# Altium PCB FPv0.12.PcbDoc (part 1 of 2)
Units mm, origin at the board's own origin, x right, y up, seen from the top; angles counter-clockwise.
Board outline 81.28 x 53.34 mm, 4 copper layers (Top Layer, GROUND PLANE, MidLayer1, Bottom Layer); 94 components, 141 nets, 574 pads, 258 vias.
Unrouted connection lines stored in the file: 31.
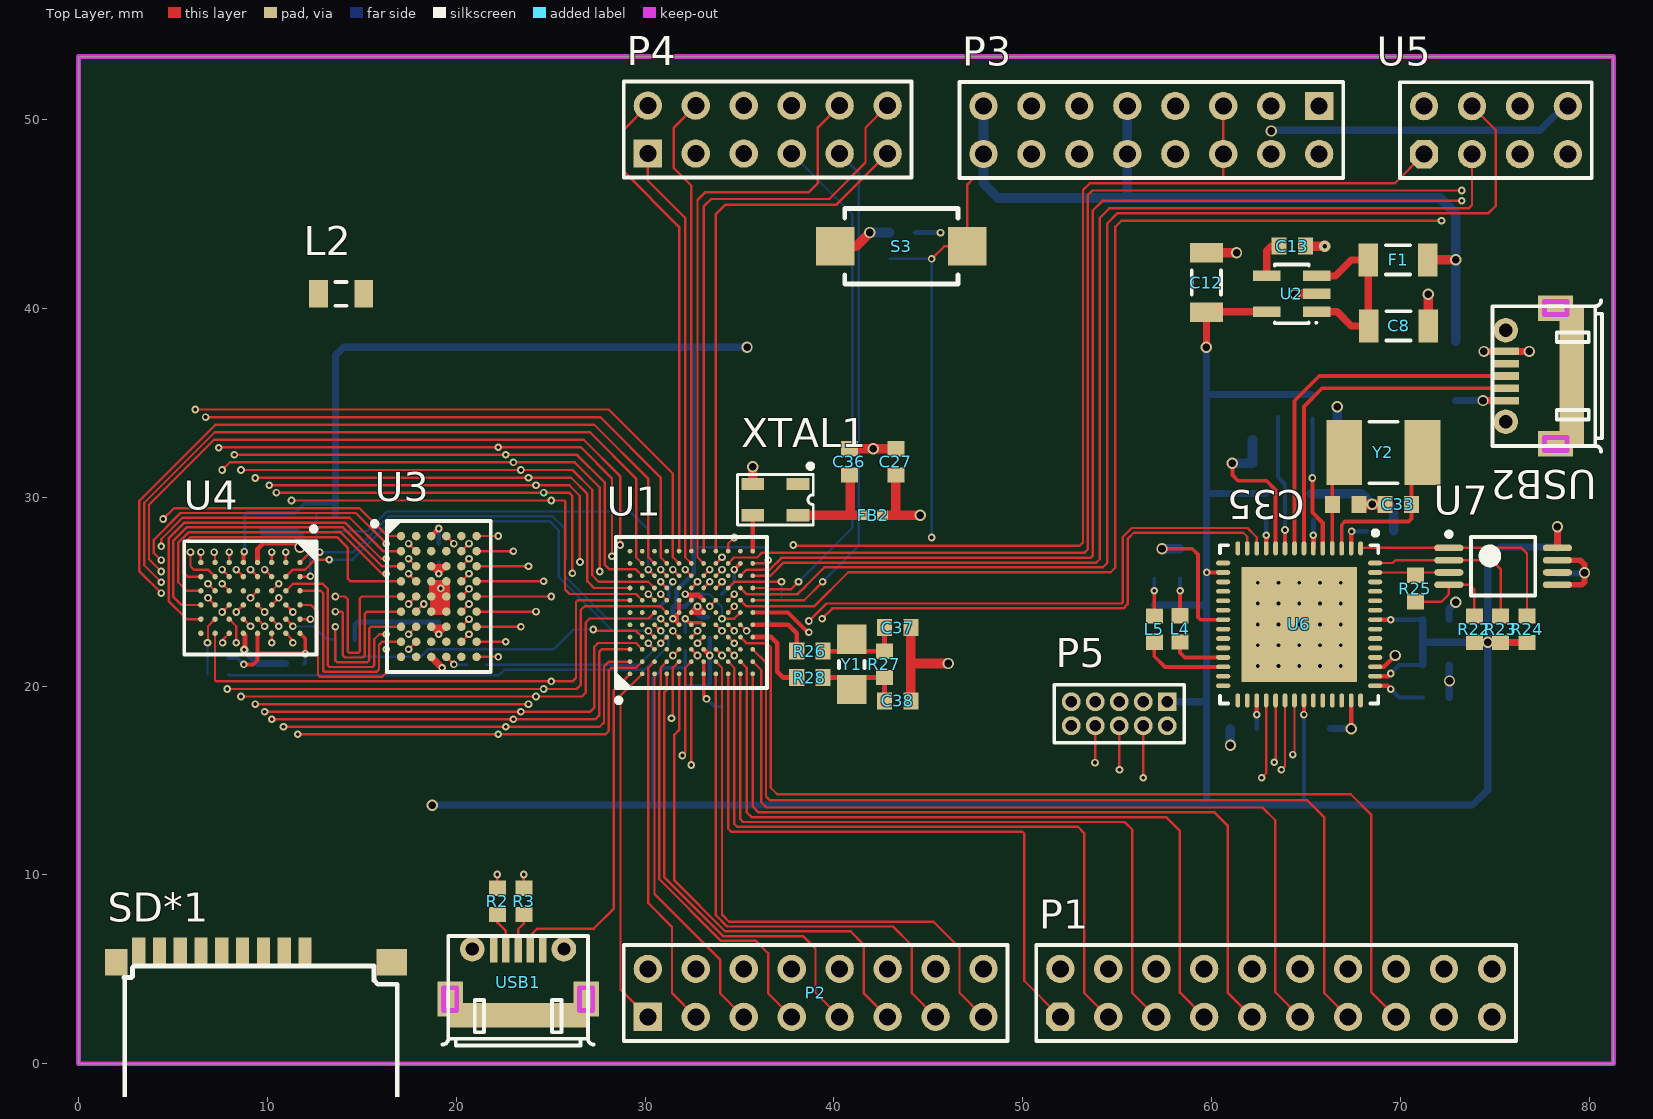
[diagram p0: Top Layer view]
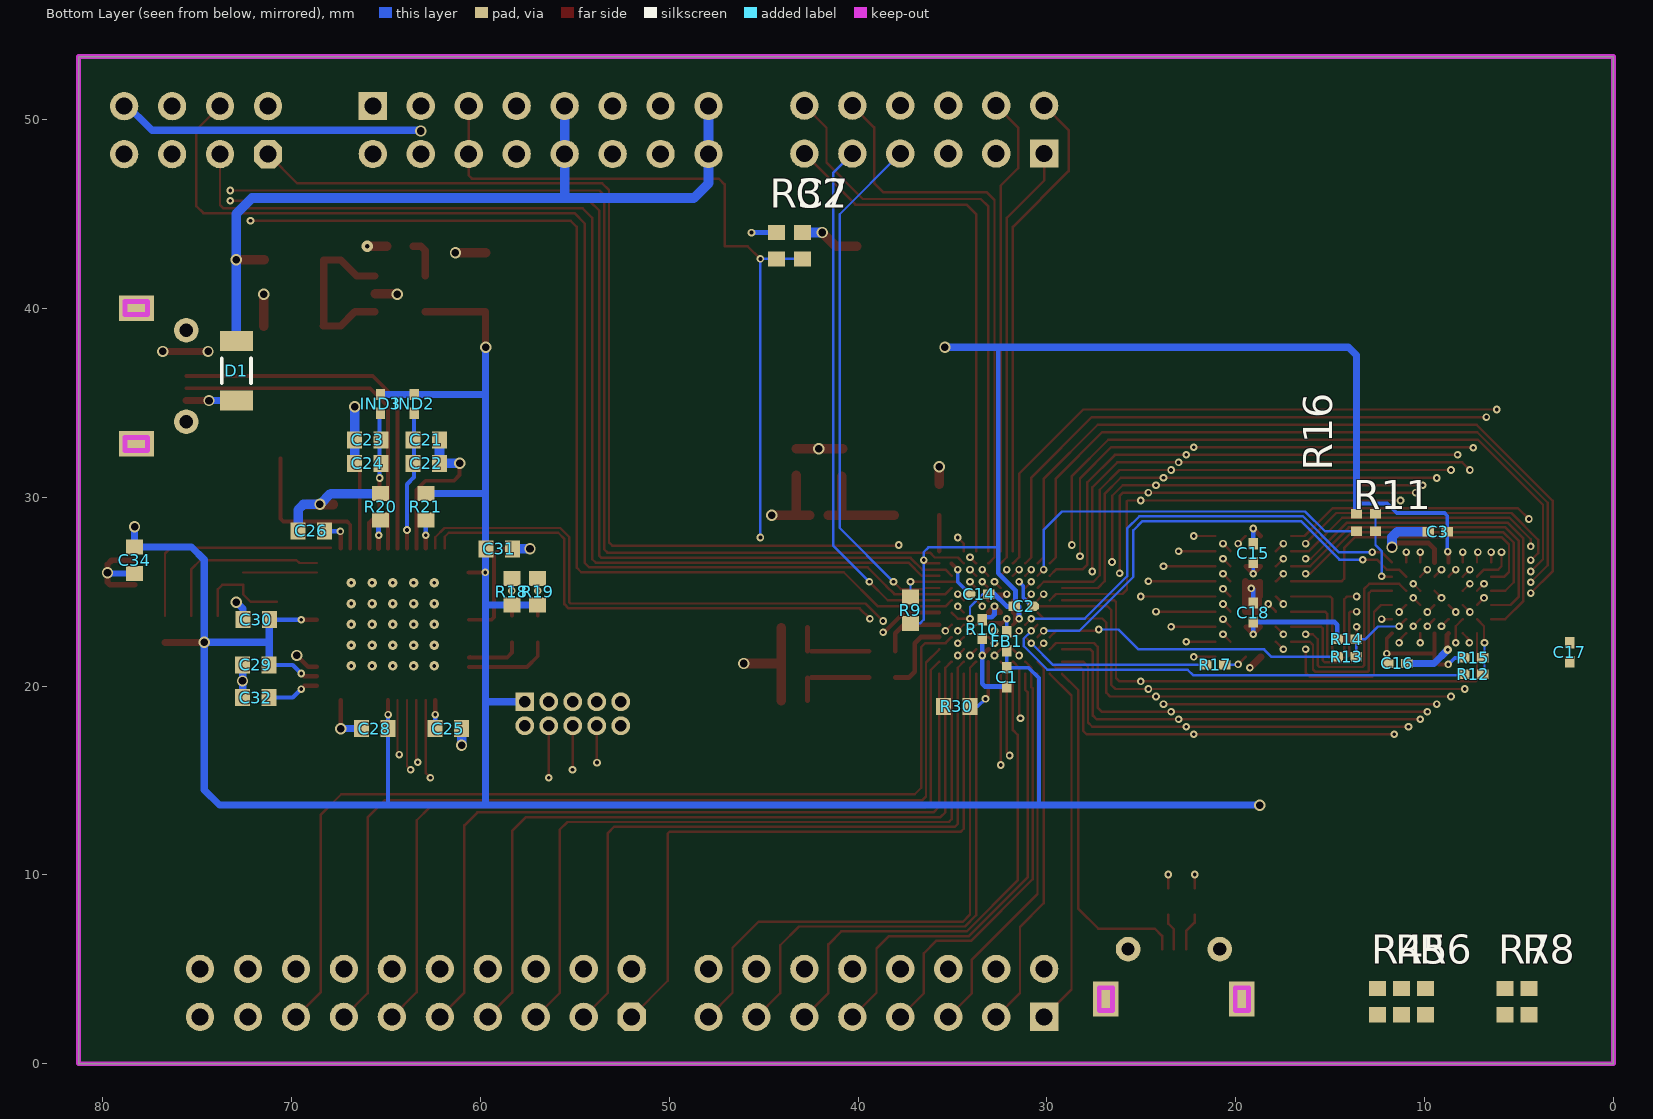
[diagram p1: Bottom Layer view, seen from below]
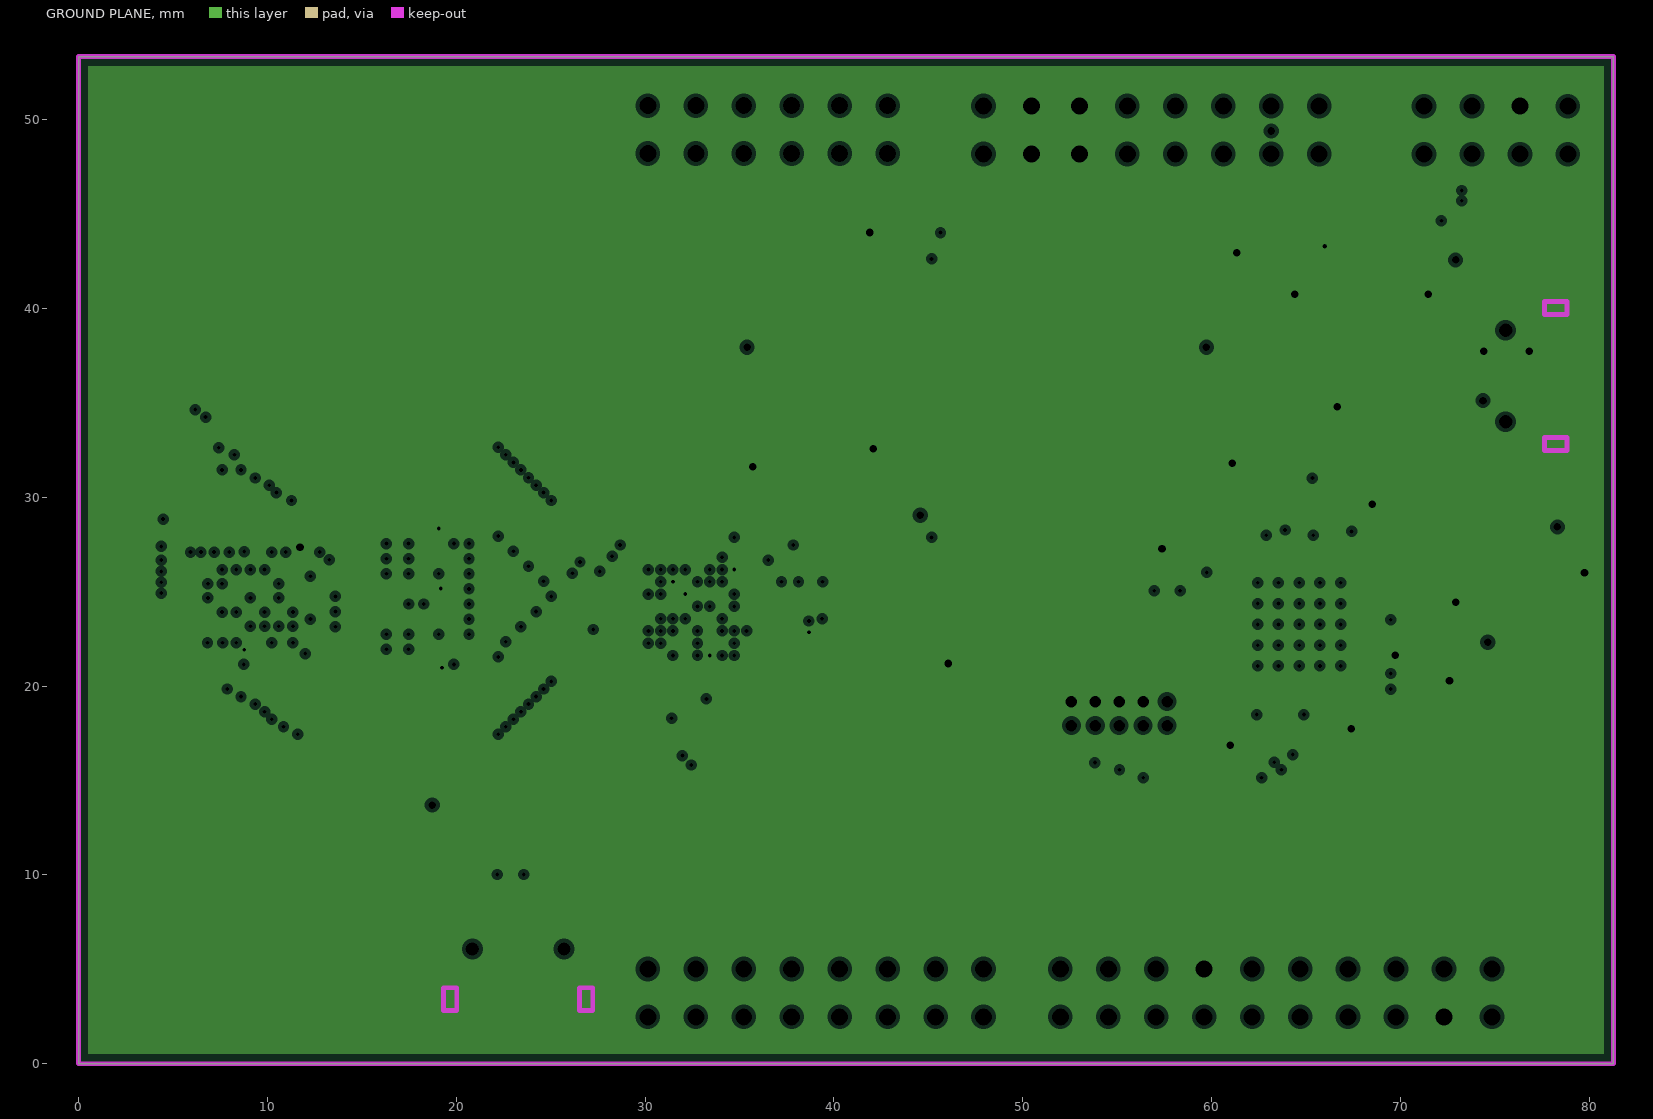
[diagram p2: GROUND PLANE, clearances drawn from the general rule]
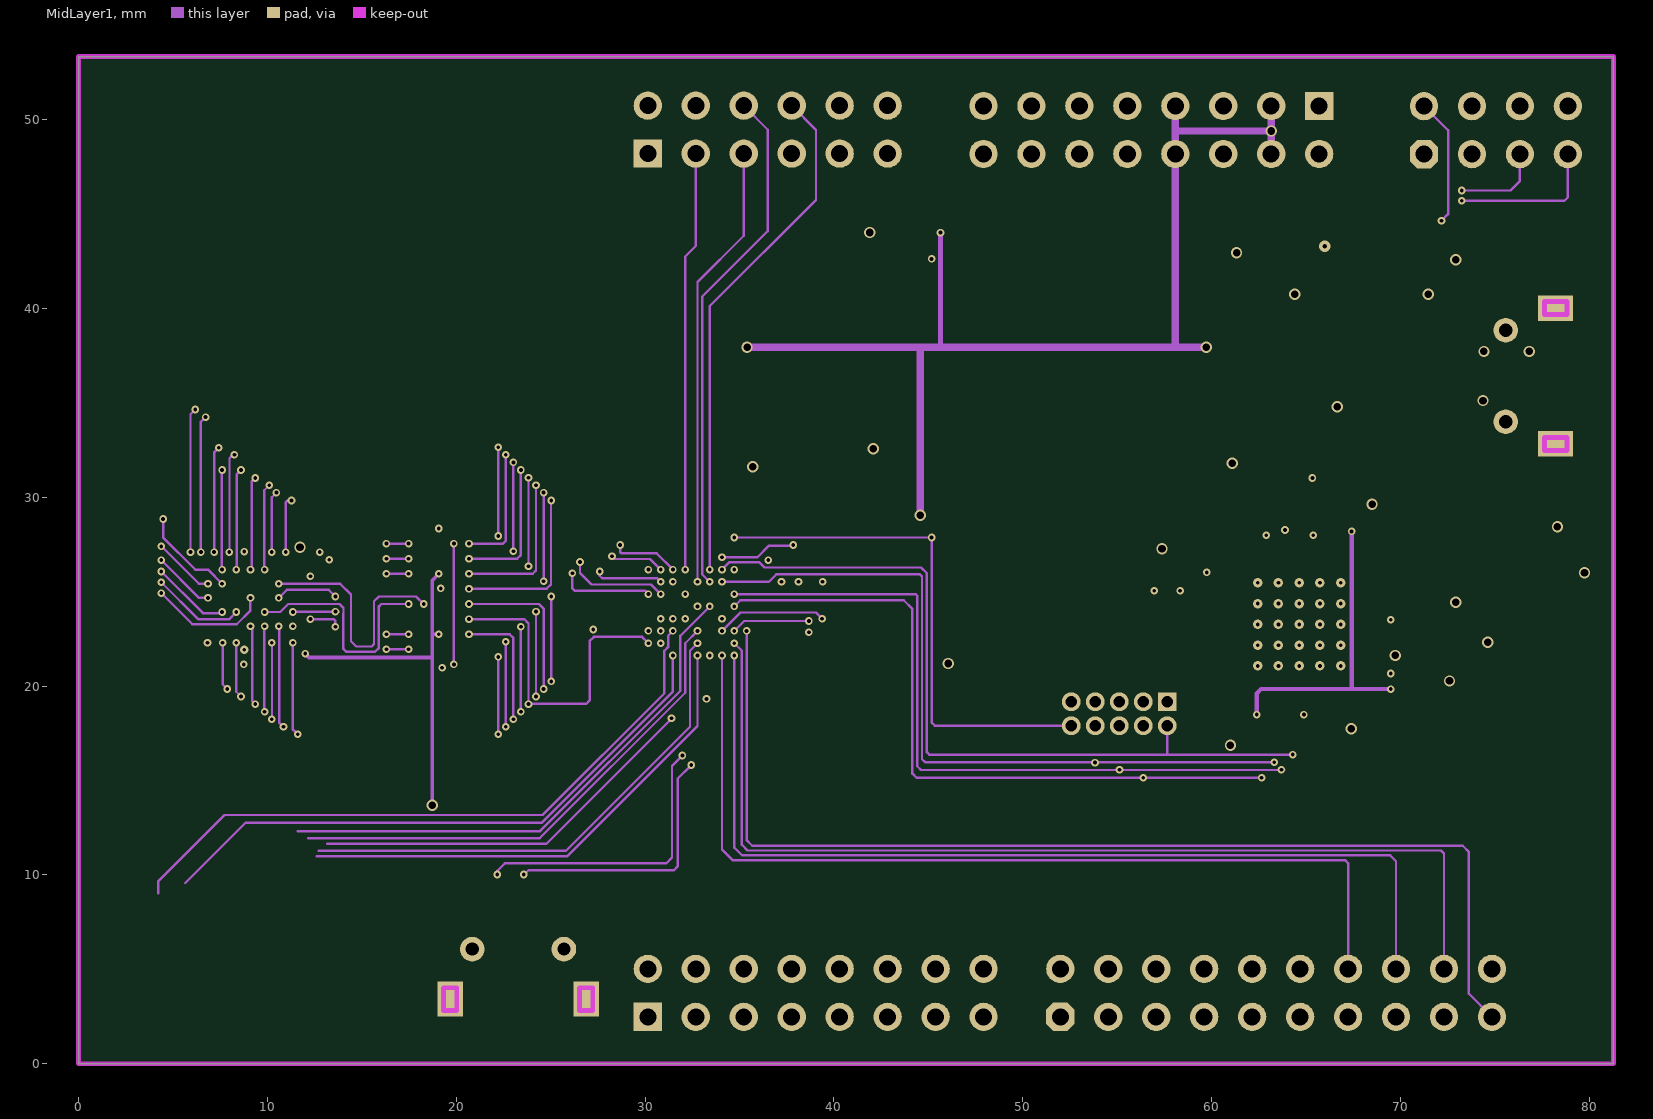
[diagram p3: MidLayer1]

## Layer stack, top to bottom
Top Layer: signal copper 0.0356
Dielectric: prepreg 0.32, FR-4, Dk 4.8
GROUND PLANE: plane copper 0.0356, net GND
Dielectric: core 0.32, FR-4, Dk 4.8
MidLayer1: signal copper 0.0356
Dielectric: prepreg 0.32, FR-4, Dk 4.8
Bottom Layer: signal copper 0.0356

## Board outline
0,0 0,53.34 81.28,53.34 81.28,0

## Design rules (kind name [scope] priority, off if disabled: settings)
Clearance [All] p1: gap=0.127
DiffPairsRouting [All] p1: maxlimit=0.254 minlimit=0.254 mostfreqgap=0.254 maxuncoupledlength=12.7
HoleSize [All] p1: absolutevalues=TRUE maxlimit=2.54 minlimit=0.2 maxpercent=80.000 minpercent=20.000
PlaneClearance [All] p1: clearance=0.203
PlaneConnect [All] p1: planeconnectstyle=Relief reliefexpansion=0.508 reliefentries=4 reliefconductorwidth=0.254 reliefairgap=0.254
PolygonConnect [All] p1: connectstyle=Relief reliefconductorwidth=0.254 reliefentries=4 polygonreliefangle="90 Angle" airgapwidth=0.254
RoutingVias [All] p1: holewidth=0.711 width=1.27 viastyle="Through Hole" minholewidth=0.711 minwidth=1.27 maxholewidth=0.711 maxwidth=1.27
SolderMaskExpansion [All] p1: expansion=0.102
Width [All] p1: maxlimit=1.778 minlimit=0.127 preferedwidth=0.254 minimp=50.000000 maximp=50.000000 favimp=50.000000
24 further rules are at their usual default settings.

## Classes and differential pairs
from-to class SRAM_DATA: "AD0 (U1-B2 : U4-B6)" "AD1 (U1-A2 : U4-C5)" "AD2 (U1-A3 : U4-C6)" "AD3 (U1-B3 : U4-D5)" "AD4 (U1-C3 : U4-E5)" "AD5 (U1-C6 : U4-F5)" "AD6 (U1-D6 : U4-F6)" "AD7 (U1-A7 : U4-G6)" "AD8 (U1-B7 : U4-B1)" "AD9 (U1-C7 : U4-C1)" "AD10 (U1-D7 : U4-C2)" "AD11 (U1-A8 : U4-D2)" "AD12 (U1-C8 : U4-E2)" "AD13 (U1-D8 : U4-F2)" "AD14 (U1-B9 : U4-F1)" "AD15 (U1-D9 : U4-G1)" "AD16 (U1-E9 : U4-F4)" "AD17 (U1-B10 : U4-E4)" "AD18 (U1-C10 : U4-D3)" "AD19 (U1-D10 : U4-H1)" "AD20 (U1-E10 : U4-G2)"
component class MCU_K64FX: C1 C2 C3 C7 C27 C36 C37 C38 FB1 FB2 P5 R4 R5 R6 R7 R8 R9 R10 R26 R27 R28 R30 R32 S3 U1 XTAL1 Y1
component class Memory: C14 C15 C16 C17 C18 R11 R12 R13 R14 R15 R16 R17 U3 U4
component class power_manage: C8 C12 C13 D1 F1 L3 R31 S4 U2
component class protocol1: L1 L2 LS1 P1 P2 P3 P4 R2 R3 S1 S2 SD*1 USB1
component class protocol2: C21 C22 C23 C24 C25 C26 C28 C29 C30 C31 C32 C33 C34 C35 IND2 IND3 L4 L5 R18 R19 R20 R21 R22 R23 R24 R25 U6 U7 USB2 Y2
component class RF_mod: U5
net class AD[20..0]: AD0 AD1 AD2 AD3 AD4 AD5 AD6 AD7 AD8 AD9 AD10 AD11 AD12 AD13 AD14 AD15 AD16 AD17 AD18 AD19 AD20
net class PTE[0..6]: PTE0 PTE1 PTE2 PTE3 PTE4 PTE5 PTE6
differential pair USB0D: +USB0D_P -USB0D_N
differential pair USB1D: +USB1D_P -USB1D_N

## Components (designator, comment, footprint, x,y, rotation, side; value= is the part's Value field where it differs from the comment)
C1 "Cap" 0402#1 32.125,20.475 r90 bottom
C2 "Cap" 0402#2 31.225,24.225 r0 bottom
C3 "Cap" 0402#1 9.3,28.175 r180 bottom
C7 "Cap" 1608[0603] 42.95,43.325 r270 bottom
C8 "Cap Pol1" 1206(2) 69.9,39.075 r0 top
C12 "Cap Pol1" 1206(2) 59.725,41.375 r90 top
C13 "Cap" 1608[0603] 64.275,43.3 r180 top
C14 "Cap Pol1" 0402#3 33.575,24.875 r0 bottom
C15 "Cap" 0402#1 19.075,27.05 r270 bottom
C16 "Cap" 0402#1 11.45,21.2 r0 bottom
C17 "Cap" 0402#1 2.3,21.8 r90 bottom
C18 "Cap" 0402#1 19.075,23.9 r270 bottom
C21 "Cap Pol1" 1608[0603] 62.866,33.046 r180 bottom
C22 "Cap" 1608[0603] 62.866,31.796 r0 bottom
C23 "Cap Pol1" 1608[0603] 65.966,33.046 r0 bottom
C24 "Cap" 1608[0603] 65.966,31.796 r180 bottom
C25 "Cap" 1608[0603] 61.7,17.75 r0 bottom
C26 "Cap" 1608[0603] 68.959,28.224 r180 bottom
C27 "Cap" 1608[0603] 43.275,31.875 r270 top
C28 "Cap" 1608[0603] 65.6,17.75 r180 bottom
C29 "Cap" 1608[0603] 71.891,21.121 r180 bottom
C30 "Cap" 1608[0603] 71.88,23.525 r180 bottom
C31 "Cap" 1608[0603] 59,27.275 r0 bottom
C32 "Cap" 1608[0603] 71.891,19.396 r0 bottom
C33 "Cap" 1608[0603] 69.893,29.621 r0 top
C34 "Cap" 1608[0603] 78.316,26.671 r90 bottom
C35 "Cap" 1608[0603] 67.099,29.621 r0 top
C36 "Cap" 1608[0603] 40.825,31.875 r270 top
C37 "Cap" 1608[0603] 43.375,23.1 r180 top
C38 "Cap" 1608[0603] 43.375,19.225 r180 top
D1 "sk4" 1206(2) 72.925,36.7 r90 bottom
F1 "300-500mA" 1206(2) 69.875,42.575 r180 top
FB1 "Inductor" 0402#1 32.125,22.375 r90 bottom
FB2 "Inductor" 0402#1 42.075,29.05 r180 top
IND2 "Inductor" 0402#1 63.516,34.946 r270 bottom
IND3 "Inductor" 0402#1 65.291,34.946 r270 bottom
L1 "LED" C2012 224.314,74.094 r0 top
L2 "LED" C2012 13.9,40.775 r0 top
L3 "LED" 1608[0603] 200.075,99.875 r270 top
L4 "LED" 1608[0603] 58.334,23.029 r270 top
L5 "LED" 1608[0603] 56.965,23.025 r270 top
LS1 "Buzzer" ABSM-1574 217.71,88.064 r90 top
P1 "Header 10X2" HDR2X10 51.989,2.485 r0 top
P2 "Header 8X2" HDR2X8 30.145,2.485 r0 top
P3 "Header 8X2" HDR2X8 65.7,50.725 r180 top
P4 "Header 6X2" HDR2X6 30.145,48.205 r0 top
P5 "JTAG" MHDR2X5 57.65,19.175 r180 top
R2 "Res" 1608[0603] 22.175,8.6 r270 top
R3 "Res" 1608[0603] 23.575,8.6 r270 top
R4 "Res" 1608[0603] 12.481,3.298 r90 bottom
R5 "Res" 1608[0603] 11.211,3.298 r90 bottom
R6 "Res" 1608[0603] 9.941,3.298 r90 bottom
R7 "Res" 1608[0603] 5.75,3.298 r90 bottom
R8 "Res" 1608[0603] 4.48,3.298 r90 bottom
R9 "Res" 1608[0603] 37.225,24.025 r90 bottom
R10 "Res" 0402#1 33.425,23.025 r90 bottom
R11 "Res" 0402#1 13.1,28.2 r0 bottom
R12 "Res" 0402#1 7.425,20.625 r0 bottom
R13 "Res" 0402#1 14.125,21.55 r0 bottom
R14 "Res" 0402#1 14.125,22.475 r0 bottom
R15 "Res" 0402#1 7.425,21.5 r0 bottom
R16 "Res" 0402#1 13.1,29.125 r0 bottom
R17 "Res" 0402#1 21.075,21.125 r180 bottom
R18 "Res" 1608[0603] 58.334,25.007 r270 bottom
R19 "Res" 1608[0603] 56.965,25.003 r270 bottom
R20 "Res" 1608[0603] 65.291,29.496 r90 bottom
R21 "Res" 1608[0603] 62.891,29.496 r90 bottom
R22 "Res" 1608[0603] 73.912,23.017 r90 top
R23 "Res" 1608[0603] 75.309,23.017 r90 top
R24 "Res" 1608[0603] 76.706,23.017 r90 top
R25 "Res" 1608[0603] 70.791,25.171 r270 top
R26 "Res" 1608[0603] 38.729,21.852 r180 top
R27 "Res" 1608[0603] 42.675,21.15 r270 top
R28 "Res" 1608[0603] 38.729,20.455 r180 top
R30 "Res" 1608[0603] 34.775,18.925 r180 bottom
R31 "Res" 1608[0603] 200.061,96.98 r90 top
R32 "Res" 1608[0603] 44.311,43.319 r270 bottom
S1 "BUTON" TACTILE-PTH 216.821,109.273 r0 top
S2 "BUTON" TACTILE-PTH 226.854,109.273 r0 top
S3 "SW-PB" SMT_Button 43.571,43.292 r0 top
S4 "SW-SPST" SPST-2 228.251,91.493 r90 top
SD*1 "TF_card" SD_card 7.825,-2.85 r90 top
U1 "MK64FX512VDC" BGA121C65P11X11_800X800X50 32.45,23.9 r90 top
U2 "MIC5219" SOT-23-5 64.25,40.775 r90 top
U3 "SN74LVC16373A(BGA54)" BGA54C80P6X9_550X800X120 19.075,24.75 r0 top
U4 "EM7164SU16" BGA48C75P6X8_598X698X104 9.1,24.675 r270 top
U5 "Header 4X2" HDR2X4 71.25,48.175 r0 top
U6 "FT2232H-56" QFN50P800X800X90_HS-57N 64.641,23.271 r270 top
U7 "AT93C46D" TSOP65P640X120-8N-AT93C46D 75.441,26.346 r0 top
USB1 "USB_5line" USB-MICRO-5P-2F#1 21.975,6.075 r180 top
USB2 "USB_5line" USB-MICRO-5P-2F#2 75.575,35.125 r270 top
XTAL1 "50M有源晶体" XTAL7_3225 36.9,29.875 r180 top
Y1 "32.768kHZ" 3215 40.95,21.15 r270 top
Y2 "12MHz" 5032 69.1,32.375 r0 top

## Footprints (in the part's own frame and the unit in brackets; to place one, negate y for a bottom-side part, rotate by r counter-clockwise, add the part's x,y. Pads: shape width x height; smd on the part's side, far side on the other; paste and mask are expansions set on the pad)
0402#1 [mm] "Chip Capacitor, Body 1.0x0.5mm, IPC High Density"
  rect 0.6x0.5 smd: 1(-0.5,0) 2(0.5,0)
  body extent -0.55,-0.3 0.55,0.3, height 1.3
0402#2 [mm] "Chip Capacitor, Body 1.0x0.5mm, IPC High Density"
  oct 0.6x0.5 smd: 1(-0.5,0)
  rect 0.6x0.5 smd: 2(0.5,0)
  body extent -0.55,-0.3 0.55,0.3, height 1.3
0402#3 [mm] "Chip Capacitor, Body 1.0x0.5mm, IPC High Density"
  rect 0.6x0.5 smd: 1(-0.5,0)
  oval 0.6x0.5 smd mask+0.051: 2(0.5,0)
  body extent -0.55,-0.3 0.55,0.3, height 1.3
1206(2) [mm]
  rect 1.05x1.75 smd: 1(-1.575,0) 2(1.575,0)
  silkscreen extent -0.65,-0.77 0.65,0.77, body extent -1.6,-0.8 1.6,0.8, height 1.6
1608[0603] [mm] "Chip Capacitor, Body 1.6x0.8mm, IPC High Density"
  rect 0.8x0.9 smd: 1(-0.7,0) 2(0.7,0)
  body extent -0.87,-0.48 0.87,0.48, height 1.3
3215 [mm]
  rect 1.54x1.55 smd: 1(-1.335,0) 2(1.335,0)
  silkscreen extent -0.2,-0.67 0.2,0.67, body extent -1.65,-0.75 1.65,0.75, height 0.75
5032 [mm]
  rect 1.9x3.45 smd: 1(-2.075,0) 2(2.075,0)
  silkscreen extent -0.75,-1.63 0.75,1.63, body extent -2.6,-1.7 2.6,1.7, height 1.3
ABSM-1574 [mm] "Magnetic Transducer Buzzer"
  rect 5x3 smd: 1(0,0) 2(11.8,0)
  rect 1.5x1.5 hole 0.7: 1A(2.65,-0.24)
  round 1.5 hole 0.7: 2A(9.15,-0.24)
  silkscreen extent -1.83,-6.4 12.3,6.4
BGA48C75P6X8_598X698X104 [mm] "BGA, 48-Leads, Body 5.98x6.98mmx1.04mm, Pitch 0.75mm"
  round 0.29 smd: A1(-1.875,2.625) A2(-1.125,2.625) A3(-0.375,2.625) A4(0.375,2.625) A5(1.125,2.625) A6(1.875,2.625) B1(-1.875,1.875) B2(-1.125,1.875) B3(-0.375,1.875) B4(0.375,1.875) B5(1.125,1.875) B6(1.875,1.875) C1(-1.875,1.125) C2(-1.125,1.125) C3(-0.375,1.125) C4(0.375,1.125) C5(1.125,1.125) C6(1.875,1.125) D1(-1.875,0.375) D2(-1.125,0.375) D3(-0.375,0.375) D4(0.375,0.375) D5(1.125,0.375) D6(1.875,0.375) E1(-1.875,-0.375) E2(-1.125,-0.375) E3(-0.375,-0.375) E4(0.375,-0.375) E5(1.125,-0.375) E6(1.875,-0.375) F1(-1.875,-1.125) F2(-1.125,-1.125) F3(-0.375,-1.125) F4(0.375,-1.125) F5(1.125,-1.125) F6(1.875,-1.125) G1(-1.875,-1.875) G2(-1.125,-1.875) G3(-0.375,-1.875) G4(0.375,-1.875) G5(1.125,-1.875) G6(1.875,-1.875) H1(-1.875,-2.625) H2(-1.125,-2.625) H3(-0.375,-2.625) H4(0.375,-2.625) H5(1.125,-2.625) H6(1.875,-2.625)
  silkscreen extent -3.77,-3.5 3,3.5, body extent -2.99,-3.49 2.99,3.49, height 1.04
BGA54C80P6X9_550X800X120 [mm] "BGA, 54-Leads, Body 5.50x8.00mmx1.20mm, Pitch 0.80mm"
  round 0.45 smd: A1(-2,3.2) A2(-1.2,3.2) A3(-0.4,3.2) A4(0.4,3.2) A5(1.2,3.2) A6(2,3.2) B1(-2,2.4) B2(-1.2,2.4) B3(-0.4,2.4) B4(0.4,2.4) B5(1.2,2.4) B6(2,2.4) C1(-2,1.6) C2(-1.2,1.6) C3(-0.4,1.6) C4(0.4,1.6) C5(1.2,1.6) C6(2,1.6) D1(-2,0.8) D2(-1.2,0.8) D3(-0.4,0.8) D4(0.4,0.8) D5(1.2,0.8) D6(2,0.8) E1(-2,0) E2(-1.2,0) E3(-0.4,0) E4(0.4,0) E5(1.2,0) E6(2,0) F1(-2,-0.8) F2(-1.2,-0.8) F3(-0.4,-0.8) F4(0.4,-0.8) F5(1.2,-0.8) F6(2,-0.8) G1(-2,-1.6) G2(-1.2,-1.6) G3(-0.4,-1.6) G4(0.4,-1.6) G5(1.2,-1.6) G6(2,-1.6) H1(-2,-2.4) H2(-1.2,-2.4) H3(-0.4,-2.4) H4(0.4,-2.4) H5(1.2,-2.4) H6(2,-2.4) J1(-2,-3.2) J2(-1.2,-3.2) J3(-0.4,-3.2) J4(0.4,-3.2) J5(1.2,-3.2) J6(2,-3.2)
  silkscreen extent -3.52,-4 2.75,4, body extent -2.75,-4 2.75,4, height 1.2
BGA121C65P11X11_800X800X50 [mm] "BGA, 121-Leads, Body 8.00x8.00mmx0.50mm, Pitch 0.65mm"
  round 0.25 smd: A1(-3.25,3.25) A2(-2.6,3.25) A3(-1.95,3.25) A4(-1.3,3.25) A5(-0.65,3.25) A6(0,3.25) A7(0.65,3.25) A8(1.3,3.25) A9(1.95,3.25) A10(2.6,3.25) A11(3.25,3.25) B1(-3.25,2.6) B2(-2.6,2.6) B3(-1.95,2.6) B4(-1.3,2.6) B5(-0.65,2.6) B6(0,2.6) B7(0.65,2.6) B8(1.3,2.6) B9(1.95,2.6) B10(2.6,2.6) B11(3.25,2.6) C1(-3.25,1.95) C2(-2.6,1.95) C3(-1.95,1.95) C4(-1.3,1.95) C5(-0.65,1.95) C6(0,1.95) C7(0.65,1.95) C8(1.3,1.95) C9(1.95,1.95) C10(2.6,1.95) C11(3.25,1.95) D1(-3.25,1.3) D2(-2.6,1.3) D3(-1.95,1.3) D4(-1.3,1.3) D5(-0.65,1.3) D6(0,1.3) D7(0.65,1.3) D8(1.3,1.3) D9(1.95,1.3) D10(2.6,1.3) D11(3.25,1.3) E1(-3.25,0.65) E2(-2.6,0.65) E3(-1.95,0.65) E4(-1.3,0.65) E5(-0.65,0.65) E6(0,0.65) E7(0.65,0.65) E8(1.3,0.65) E9(1.95,0.65) E10(2.6,0.65) E11(3.25,0.65) F1(-3.25,0) F2(-2.6,0) F3(-1.95,0) F4(-1.3,0) F5(-0.65,0) F6(0,0) F7(0.65,0) F8(1.3,0) F9(1.95,0) F10(2.6,0) F11(3.25,0) G1(-3.25,-0.65) G2(-2.6,-0.65) G3(-1.95,-0.65) G4(-1.3,-0.65) G5(-0.65,-0.65) G6(0,-0.65) G7(0.65,-0.65) G8(1.3,-0.65) G9(1.95,-0.65) G10(2.6,-0.65) G11(3.25,-0.65) H1(-3.25,-1.3) H2(-2.6,-1.3) H3(-1.95,-1.3) H4(-1.3,-1.3) H5(-0.65,-1.3) H6(0,-1.3) H7(0.65,-1.3) H8(1.3,-1.3) H9(1.95,-1.3) H10(2.6,-1.3) H11(3.25,-1.3) J1(-3.25,-1.95) J2(-2.6,-1.95) J3(-1.95,-1.95) J4(-1.3,-1.95) J5(-0.65,-1.95) J6(0,-1.95) J7(0.65,-1.95) J8(1.3,-1.95) J9(1.95,-1.95) J10(2.6,-1.95) J11(3.25,-1.95) K1(-3.25,-2.6) K2(-2.6,-2.6) K3(-1.95,-2.6) K4(-1.3,-2.6) K5(-0.65,-2.6) K6(0,-2.6) K7(0.65,-2.6) K8(1.3,-2.6) K9(1.95,-2.6) K10(2.6,-2.6) K11(3.25,-2.6) L1(-3.25,-3.25) L2(-2.6,-3.25) L3(-1.95,-3.25) L4(-1.3,-3.25) L5(-0.65,-3.25) L6(0,-3.25) L7(0.65,-3.25) L8(1.3,-3.25) L9(1.95,-3.25) L10(2.6,-3.25) L11(3.25,-3.25)
  silkscreen extent -4.77,-4 4,4, body extent -4,-4 4,4, height 0.5
C2012 [mm] "Chip Capacitor, 2-Leads, Body 2.0x1.2mm, IPC Low Density"
  rect 1x1.45 smd: 1(-1.2,0) 2(1.2,0)
  silkscreen extent -0.3,-0.63 0.3,0.63, body extent -0.98,-0.6 1.02,0.6, height 0.5
HDR2X4 [mm] "Connector; Header; 4x2 Position"
  oct 1.5x1.5 hole 0.9: 1(0,0)
  round 1.5 hole 0.9: 2(0,2.54) 3(2.54,0) 4(2.54,2.54) 5(5.08,0) 6(5.08,2.54) 7(7.62,0) 8(7.62,2.54)
  silkscreen extent -1.27,-1.27 8.89,3.81, body extent -1.27,-1.27 8.89,3.81, height 7.58
HDR2X6 [mm] "Connector; Header; 6x2 Position"
  rect 1.5x1.5 hole 0.9: 1(0,0)
  round 1.5 hole 0.9: 2(0,2.54) 3(2.54,0) 4(2.54,2.54) 5(5.08,0) 6(5.08,2.54) 7(7.62,0) 8(7.62,2.54) 9(10.16,0) 10(10.16,2.54) 11(12.7,0) 12(12.7,2.54)
  silkscreen extent -1.27,-1.27 13.97,3.81, body extent -1.27,-1.27 13.97,3.81, height 7.58
HDR2X8 [mm] "Connector; Header; 8x2 Position"
  rect 1.5x1.5 hole 0.9: 1(0,0)
  round 1.5 hole 0.9: 2(0,2.54) 3(2.54,0) 4(2.54,2.54) 5(5.08,0) 6(5.08,2.54) 7(7.62,0) 8(7.62,2.54) 9(10.16,0) 10(10.16,2.54) 11(12.7,0) 12(12.7,2.54) 13(15.24,0) 14(15.24,2.54) 15(17.78,0) 16(17.78,2.54)
  silkscreen extent -1.27,-1.27 19.05,3.81, body extent -1.27,-1.27 19.05,3.81, height 7.58
HDR2X10 [mm] "Connector; Header; 10x2 Position"
  oct 1.5x1.5 hole 0.9: 1(0,0)
  round 1.5 hole 0.9: 2(0,2.54) 3(2.54,0) 4(2.54,2.54) 5(5.08,0) 6(5.08,2.54) 7(7.62,0) 8(7.62,2.54) 9(10.16,0) 10(10.16,2.54) 11(12.7,0) 12(12.7,2.54) 13(15.24,0) 14(15.24,2.54) 15(17.78,0) 16(17.78,2.54) 17(20.32,0) 18(20.32,2.54) 19(22.86,0) 20(22.86,2.54)
  silkscreen extent -1.27,-1.27 24.13,3.81, body extent -1.27,-1.27 24.13,3.81, height 7.58
MHDR2X5 [mm] "Connector; Header; 5x2 Position"
  rect 1x1 hole 0.6: 1(0,0)
  round 1 hole 0.6: 2(0,1.27) 3(1.27,0) 4(1.27,1.27) 5(2.54,0) 6(2.54,1.27) 7(3.81,0) 8(3.81,1.27) 9(5.08,0) 10(5.08,1.27)
  silkscreen extent -0.9,-0.9 5.98,2.17
QFN50P800X800X90_HS-57N [mm] "QFN, 56-Leads, Body 8.00x8.00mm, Pitch 0.50mm, Thermal Pad 6.10x6.10mm, IPC Medium Density"
  oval 0.75x0.25 smd: 1(-4.025,3.25) 2(-4.025,2.75) 3(-4.025,2.25) 4(-4.025,1.75) 5(-4.025,1.25) 6(-4.025,0.75) 7(-4.025,0.25) 8(-4.025,-0.25) 9(-4.025,-0.75) 10(-4.025,-1.25) 11(-4.025,-1.75) 12(-4.025,-2.25) 13(-4.025,-2.75) 14(-4.025,-3.25) 29(4.025,-3.25) 30(4.025,-2.75) 31(4.025,-2.25) 32(4.025,-1.75) 33(4.025,-1.25) 34(4.025,-0.75) 35(4.025,-0.25) 36(4.025,0.25) 37(4.025,0.75) 38(4.025,1.25) 39(4.025,1.75) 40(4.025,2.25) 41(4.025,2.75) 42(4.025,3.25)
  oval 0.25x0.75 smd: 15(-3.25,-4.025) 16(-2.75,-4.025) 17(-2.25,-4.025) 18(-1.75,-4.025) 19(-1.25,-4.025) 20(-0.75,-4.025) 21(-0.25,-4.025) 22(0.25,-4.025) 23(0.75,-4.025) 24(1.25,-4.025) 25(1.75,-4.025) 26(2.25,-4.025) 27(2.75,-4.025) 28(3.25,-4.025) 43(3.25,4.025) 44(2.75,4.025) 45(2.25,4.025) 46(1.75,4.025) 47(1.25,4.025) 48(0.75,4.025) 49(0.25,4.025) 50(-0.25,4.025) 51(-0.75,4.025) 52(-1.25,4.025) 53(-1.75,4.025) 54(-2.25,4.025) 55(-2.75,4.025) 56(-3.25,4.025)
  rect 6.1x6.1 smd: 57(0,0)
  silkscreen extent -4.96,-4.19 4.19,4.19, body extent -4.04,-4.04 4.04,4.04, height 0.9
SD_card [mm]
  rect 1.6x0.7 smd: 1(8.732,-4.16) 2(8.732,-3.06) 3(8.732,-1.96) 4(8.732,-0.86) 5(8.732,0.24) 6(8.732,1.34) 7(8.732,2.44) 8(8.732,3.54) 9(8.732,4.64)
  rect 1.4x1.2 smd: 10(8.232,5.84)
  rect 2.2x1.2 smd: 11(-1.368,5.84) 12(-1.368,-9.66)
  rect 1.4x1.6 smd: 13(8.232,-8.76)
  silkscreen extent -5.79,-9.04 8.03,5.43
SMT_Button [mil]
  rect 80x80 smd: 1(-137.8,0) 2(137.8,0)
  silkscreen extent -118,-79 118,79
SOT-23-5 [mm] "SOT-23/SC-74A; 5 Leads; Body 3.1 x 3 mm, inc. leads (LxW max)"
  rect 0.55x1.45 smd: 1(-0.95,-1.329) 2(0,-1.329) 3(0.95,-1.329) 4(0.95,1.329) 5(-0.95,1.329)
  silkscreen extent -1.57,-1.35 1.55,0.9
SPST-2 [mm] "Switch; 2 Leads"
  rect 1.85x1.85 hole 1.1: 1(-2.54,0)
  round 1.85 hole 1.1: 2(2.54,0)
  silkscreen extent -4.89,-1.27 4.28,1.27
TACTILE-PTH [mil] "直插按钮"
  round 80 hole 40: 1(-128,89) 2(128,89) 3(-128,-89) 4(128,-89)
  silkscreen extent -120,-120 120,120, body extent -162,-118 162,118, height 213
TSOP65P640X120-8N-AT93C46D [mm] "TSOP, 8-Leads, Body 3.00x4.40mm, Pitch 0.65mm, IPC Medium Density"
  oval 1.55x0.35 smd: 1(-2.875,0.975) 2(-2.875,0.325) 3(-2.875,-0.325) 4(-2.875,-0.975) 5(2.875,-0.975) 6(2.875,-0.325) 7(2.875,0.325) 8(2.875,0.975)
  silkscreen extent -3,-1.55 1.7,1.82, body extent -2.25,-1.55 2.25,1.55, height 1.2
USB-MICRO-5P-2F#1 [mm]
  round 1.3 hole 0.7: 0(-3.725,0) 0(1.125,0)
  rect 0.4x1.4 smd: 1(0,0) 2(-0.65,0) 3(-1.3,0) 4(-1.95,0) 5(-2.6,0)
  rect 1.35x1.85 all layers, no hole: 6(2.3,2.65) 7(-4.9,2.65)
  rect 7.35x1.3 smd: 8(-1.3,3.5)
  Keep-Out Layer lines w0.254: 2.65,3.25 2.65,2.05 1.95,2.05 1.95,3.25 2.65,3.25 ; -4.55,3.25 -5.25,3.25 -5.25,2.05 -4.55,2.05 -4.55,3.25
  silkscreen extent -5.3,-0.7 2.7,5.1
USB-MICRO-5P-2F#2 [mm]
  round 1.3 hole 0.7 mask+0.051: 0(-3.725,0) 0(1.125,0)
  rect 0.4x1.4 smd: 1(0,0) 2(-0.65,0) 3(-1.3,0) 4(-1.95,0) 5(-2.6,0)
  rect 1.35x1.85 all layers, no hole: 6(2.3,2.65) 7(-4.9,2.65)
  rect 7.35x1.3 smd: 8(-1.3,3.5)
  Keep-Out Layer lines w0.254: 2.65,2.05 2.65,3.25 1.95,3.25 1.95,2.05 2.65,2.05 ; -4.55,2.05 -5.25,2.05 -5.25,3.25 -4.55,3.25 -4.55,2.05
  silkscreen extent -5.3,-0.7 2.7,5.1
XTAL7_3225 [mil]
  rect 47.2x25.6 smd: 1(-47.25,-32.5) 2(47.25,-32.5) 3(47.25,32.5) 4(-47.25,32.5)
  silkscreen extent -79,-75 79,53

## Part data
C1 C2 C3 C7 C13 C15 C16 C17 C18 C22 C24 C25 C26 C27 C28 C29 C30 C31 C32 C33 C34 C35 C36 C37 C38: "贴片电容"
C8 C12 C14 C21 C23: "Polarized Capacitor (Radial)"
D1: library part "Diode 1N4001", "1 Amp General Purpose Rectifier"
F1: library part "Fuse 1", "Fuse"
LS1: "Magnetic Transducer Buzzer"
P1: "Header, 10-Pin, Dual row"
P2 P3: "Header, 8-Pin, Dual row"
P4: "Header, 6-Pin, Dual row"
P5: library part "Header 5X2", "Header, 5-Pin, Dual row"
R2 R3 R4 R5 R6 R7 R8 R9 R10 R11 R12 R13 R14 R15 R16 R17 R18 R19 R20 R21 R22 R23 R24 R25 R26 R27 R28 R30 R31 R32: "贴片电阻"
S3: "Switch"
S4: "Single-Pole, Single-Throw Switch"
U2: "LDO"
U5: "Header, 4-Pin, Dual row"
XTAL1: library part 有源晶体
Y1 Y2: library part XTAL, "晶体振荡器"

## Via types
v1: diameter 0.403, hole 0.2, Top Layer to Bottom Layer, tented both sides, 200 vias
v2: diameter 0.6, hole 0.4, Top Layer to Bottom Layer, tented both sides, 29 vias
v3: diameter 0.5, hole 0.2, Top Layer to Bottom Layer, 25 vias
v4: diameter 1, hole 1, Top Layer to Bottom Layer, 2 vias
v5: diameter 0.6, hole 0.24, Top Layer to Bottom Layer, tented both sides, 1 vias
v6: diameter 0.453, hole 0.2, Top Layer to Bottom Layer, tented both sides, 1 vias

## Nets (pads, with @x,y where several pads share a name; then routed paths per layer and width w, separated by ;. In a path a pad name is that pad's centre, name@x,y a point inside that pad or via, vN(x,y) a via of type N, cw(c..) or ccw(c..) an arc to the next point about the centre after c; other vN are vias at no path point)
1.8V: C25.2 C26.2 C32.1 U6.2 U6.31 U6.43 | length 22.6
  Top Layer w0.229: v1(62.391,18.496) U6.31@62.391,19.246 ; U6.2@67.391,27.296 v1@67.391,28.171 ; U6.43@68.666,20.021 69.316,20.021 v1(69.491,19.846)
  MidLayer1 w0.229: v1(62.391,18.496) 62.391,19.616 62.621,19.846 v1(69.491,19.846) ; 67.416,19.85 v1(67.416,28.196)
  Bottom Layer w0.229: C25.2@62.391,17.746 v1(62.391,18.496) ; v1(67.416,28.196) C26.2@68.231,28.196 ; v1(69.491,19.846) 69.941,19.396 C32.1@71.191,19.396
3.3V: C1.2 C2.2 C3.2 C12.1 C14.1 C15.2 C16.2 C17.2 C18.2 C27.2 C28.2 C29.2 C30.2 C31.2 C34.2 FB1.1 FB2.1 IND2.1 IND3.1 P3.3 P3.4 P3.7 P3.8 P5.1 R4.1 R5.1 R6.1 R7.1 R8.1 R9.1 R14.2 R15.2 R16.2 R18.2 R19.2 R21.2 R22.1 R23.1 R24.1 R32.1 SD*1.4 U1.E5 U1.E6 U1.E7 U1.K6 U1.L10 U2.5 U3.C3 U3.C4 U3.G3 U3.G4 U4.A6 U4.D6 U4.E1 U5.8 U6.16 U6.36 U6.44 U6.50 U7.6 U7.8 | length 335.6
  Top Layer w0.127: v1(34.075,23.575) 34.725,23.575 U1.K6@35.05,23.9 ; U1.L10@35.7,26.5 36.425,26.5 v1@36.6,26.675
  Top Layer w0.203: U4.E1@8.725,26.55 v1@8.725,27.075 ; v1(8.75,21.15) 9.25,21.15 9.475,21.375 9.475,21.725 ; U4.D6@9.475,22.8 9.475,21.725 ; U4.A6@11.725,22.8 12,22.525 v1(12,21.725) 9.475,21.725 ; v1(31.475,23.575) 31.695,23.795 ; v1(31.475,23.575) 31.695,23.355 ; U1.E5@31.8,23.25 31.695,23.355 ; U1.E7@31.8,24.55 U1.E6@31.8,23.9 31.695,23.795 ; 31.695,23.355 31.695,23.795
  Top Layer w0.229: v1(59.75,26.025) 59.7,26.025 59.704,26.021 U6.16@60.616,26.021 ; v1(64.891,18.496) U6.36@64.891,19.246 ; U6.44@68.666,20.521 69.341,20.521 v1(69.491,20.671) ; U6.50@68.666,23.521 v1(69.491,23.521)
  Top Layer w0.254: v1@8.725,27.075 v1(8.775,27.125) ; U3.G3@18.675,23.15 U3.G3@18.7,23.15 ; U3.G3@18.7,23.175 U3.G3@18.7,23.15 ; 19.075,26.35 v1@19.075,25.95 ; U3.G3@18.7,23.15 18.7,23.125 v1(19.075,22.75) ; U3.G3@18.7,23.15 19.075,23.15 ; v1(19.075,22.75) 19.075,23.15 ; v1(19.075,22.75) U3.G4@19.475,23.15 19.075,23.15 ; v1@19.075,25.95 U3.C4@19.475,26.35 U3.C3@18.675,26.35 v1@19.075,25.95
  Top Layer w0.381: v2(59.725,37.95) C12.1@59.725,39.8 59.75,39.825 U2.5@62.921,39.825 ; R22.1@73.912,22.317 R23.1@75.309,22.317 R24.1@76.706,22.317 ; U7.8@78.316,27.321 v2(78.316,28.434)
  Top Layer w0.508: FB2.1@42.575,29.05 43.275,29.05 ; C27.2@43.275,31.175 43.275,29.05 ; v2(44.575,29.05) 43.275,29.05
  MidLayer1 w0.203: v1(12,21.725) 12.205,21.52 18.725,21.52 ; v2@18.725,13.85 18.725,22.75 ; v1(19.075,22.75) 18.725,22.75 ; v1(19.075,25.95) 18.725,25.6 18.725,22.75
  MidLayer1 w0.254: 45.644,37.956 v1(45.644,44.019)
  MidLayer1 w0.381: v2(35.4,37.95) 44.575,37.95 ; v2(44.575,29.05) 44.575,37.95 ; P3.7@58.08,50.725 58.08,49.4 ; v2(59.725,37.95) 58.08,37.95 ; P3.4@63.16,48.185 v2(63.16,49.4) ; P3.3@63.16,50.725 v2(63.16,49.4) ; 44.575,37.95 58.08,37.95 ; 58.08,37.95 P3.8@58.08,48.185 58.08,49.4 ; 58.08,49.4 v2(63.16,49.4)
  Bottom Layer w0.127: 32.581,27.35 36.275,27.35 36.525,27.1 v1(36.525,26.675) 36.525,23.525 36.725,23.325 R9.1@37.225,23.325 ; C14.1@33.075,24.875 33.4,24.875 34.075,24.2 v1(34.075,23.575)
  Bottom Layer w0.203: R15.2@7.925,21.5 8.4,21.5 v1(8.75,21.15) ; v1@8.8,27.15 C3.2@8.8,28.175 8.8,29.025 8.95,29.175 11.475,29.175 11.975,29.675 13.6,29.675 ; C16.2@11.95,21.2 12,21.25 v1(12,21.725) ; v1@19.075,26.125 C15.2@19.075,26.55 ; 30.425,13.7 30.425,20.425 30.975,20.975 C1.2@32.125,20.975 FB1.1@32.125,21.875
  Bottom Layer w0.229: C28.2@64.895,17.748 v1@64.895,18.492 ; 64.9,13.775 C28.2@64.9,17.75 ; v1(69.491,20.671) 69.941,21.121 C29.2@71.191,21.121 ; v1(69.491,23.521) C30.2@71.176,23.521
  Bottom Layer w0.254: R14.2@14.625,22.475 14.625,23.25 14.775,23.4 C18.2@19.075,23.4 v1(19.075,22.75) ; v1(31.475,23.575) 31.475,24.225 32.125,24.225 32.775,24.875 C14.1@33.025,24.875 ; C2.2@31.725,24.225 31.669,24.281 31.669,25.075 32.581,25.986 32.581,27.35 32.581,37.95 ; R32.1@44.311,44.019 v1(45.644,44.019)
  Bottom Layer w0.381: R16.2@13.6,29.125 13.6,29.675 13.6,37.525 14.025,37.95 32.581,37.95 v2(35.4,37.95) ; v2(18.725,13.7) 30.425,13.7 59.725,13.7 ; R19.2@56.965,24.303 59.725,24.303 ; P5.1@57.65,19.175 59.725,19.175 ; v2(59.725,37.95) 59.725,30.196 ; 59.746,35.446 IND2.1@63.516,35.446 IND3.1@65.291,35.446 ; R21.2@62.891,30.196 59.725,30.196 ; v2(63.16,49.4) 63.203,49.443 77.398,49.443 U5.8@78.87,50.915 ; C30.2@71.18,23.525 71.18,21.132 C29.2@71.191,21.121 ; 71.205,22.325 v2(74.625,22.325) ; v2(78.316,28.434) C34.2@78.316,27.371 75.296,27.371 74.625,26.7 v2(74.625,22.325) ; 59.725,13.7 73.825,13.7 74.625,14.5 v2(74.625,22.325) ; 59.725,13.7 59.725,19.175 ; 59.725,19.175 59.725,24.303 ; 59.725,24.303 59.725,30.196
5V: C8.1 F1.2 L3.1 U2.1 U2.3 | length 9.6
  Top Layer w0.381: U2.1@65.579,39.825 66.65,39.825 67.4,39.075 C8.1@68.325,39.075 68.3,39.1 F1.2@68.3,42.575 67.4,42.575 66.55,41.725 U2.3@65.579,41.725
50MHZ: U1.L11 XTAL1.3 | length 1.9
  Top Layer w0.254: U1.L11@35.7,27.15 XTAL1.3@35.7,29.049
AD0: U1.B2 U3.J6 U4.B6 | length 32.6
  Top Layer w0.127: U4.B6@10.975,22.8 11.35,22.425 v1(11.35,22.3) ; v1(11.6,17.45) v1(22.225,17.45) 27.9,17.45 28.076,17.626 28.076,20.833 28.226,20.983 29.533,20.983 U1.B2@29.85,21.3 ; U3.J6@21.075,21.55 v1(22.225,21.55)
  MidLayer1 w0.127: v1(11.35,22.3) 11.35,17.7 v1(11.6,17.45) ; v1(22.225,17.45) v1(22.225,21.55)
AD1: U1.A2 U3.H6 U4.C5 | length 33.6
  Top Layer w0.127: U4.C5@10.225,23.55 v1(10.6,23.175) ; v1(10.85,17.85) v1(22.625,17.85) 27.6,17.85 27.822,18.072 27.822,21.033 28.089,21.3 U1.A2@29.2,21.3 ; U3.H6@21.075,22.35 v1(22.625,22.35)
  MidLayer1 w0.127: v1(10.6,23.175) 10.617,23.158 10.617,18.083 v1(10.85,17.85) ; v1@22.575,22.35 v1@22.617,22.308 ; v1(22.625,17.85) v1(22.625,22.35)
AD2: U1.A3 U3.H5 U4.C6 | length 34.3
  Top Layer w0.127: v1(10.225,18.25) v1(23.025,18.25) 27.375,18.25 27.568,18.443 27.568,21.818 27.7,21.95 U1.A3@29.2,21.95 ; v1(10.225,22.3) U4.C6@10.225,22.8 ; U3.H5@20.275,22.35 v1(20.675,22.75)
  MidLayer1 w0.127: v1(10.225,22.3) 10.242,22.283 v1@10.242,18.25 ; v1(20.675,22.75) 22.825,22.75 23.025,22.55 v1(23.025,18.25)
AD3: U1.B3 U3.G6 U4.D5 | length 35.4
  Top Layer w0.127: U4.D5@9.475,23.55 v1(9.85,23.175) ; v1(9.85,18.65) v1(23.425,18.65) 27.1,18.65 27.314,18.864 27.314,22.083 27.514,22.283 29.517,22.283 U1.B3@29.85,21.95 ; U3.G6@21.075,23.15 v1(23.425,23.15)
  MidLayer1 w0.127: v1@9.833,18.65 9.833,23.158 v1(9.85,23.175) ; v1(23.425,18.65) v1(23.425,23.15)
AD4: U1.C3 U3.G5 U4.E5 | length 37.4
  Top Layer w0.127: U4.E5@8.725,23.55 v1(9.1,23.175) ; v1(9.35,19.05) v1@23.625,19.05 ; U3.G5@20.275,23.15 v1(20.675,23.55) ; v1(30.175,22.275) U1.C3@30.5,21.95
  MidLayer1 w0.127: v1(9.1,23.175) 9.2,23.075 9.2,19.2 v1(9.35,19.05) ; v1(20.675,23.55) 23.6,23.55 23.825,23.325 v1@23.825,19.058 ; v1@23.833,19.058 26.883,19.058 27.064,19.239 27.064,22.383 27.289,22.608 29.842,22.608 v1(30.175,22.275)
  other v1: 23.825,19.05
AD5: U1.C6 U3.F6 U4.F5 | length 37.9
  Top Layer w0.127: U4.F5@7.975,23.55 8.35,23.175 v1(8.35,22.3) ; v1(8.6,19.45) v1(24.225,19.45) 26.65,19.45 26.847,19.647 26.847,23.358 27.072,23.583 30.183,23.583 U1.C6@30.5,23.9 ; U3.F6@21.075,23.95 v1(24.225,23.95)
  MidLayer1 w0.127: v1(8.35,22.3) 8.35,19.7 v1(8.6,19.45) ; v1(24.225,19.45) v1(24.225,23.95)
AD6: U1.D6 U3.F5 U4.F6 | length 39.6
  Top Layer w0.127: v1@7.6,22.3 v1(7.625,22.3) 7.625,22.45 U4.F6@7.975,22.8 ; v1(7.875,19.85) v1(24.625,19.85) 26.375,19.85 26.593,20.068 26.593,24.033 26.793,24.233 30.817,24.233 U1.D6@31.15,23.9 ; U3.F5@20.275,23.95 v1(20.675,24.35)
  MidLayer1 w0.127: v1(7.625,22.3) 7.625,20.1 v1(7.875,19.85) ; v1(20.675,24.35) 24.38,24.35 24.625,24.105 v1(24.625,19.85)
AD7: U1.A7 U3.E6 U4.G6 | length 37.1
  Top Layer w0.127: U4.G6@7.225,22.8 7.225,20.325 7.3,20.25 v1(25.025,20.25) 26.15,20.25 26.339,20.439 26.339,24.458 26.431,24.55 U1.A7@29.2,24.55 ; U3.E6@21.075,24.75 v1(25.025,24.75)
  MidLayer1 w0.127: v1(25.025,20.25) v1(25.025,24.75)
AD8: U1.B7 U3.E5 U4.B1 | length 36.5
  Top Layer w0.127: U4.B1@10.975,26.55 v1(10.975,27.1) ; v1(11.275,29.833) v1(25.025,29.833) 25.717,29.833 25.764,29.786 25.764,26.719 25.758,26.712 25.758,25.117 25.992,24.883 29.517,24.883 U1.B7@29.85,24.55 ; U3.E5@20.275,24.75 v1(20.675,25.15)
  MidLayer1 w0.127: v1(10.975,27.1) 10.975,29.75 11.058,29.833 v1(11.275,29.833) ; v1(20.675,25.15) 20.683,25.158 24.787,25.158 25.017,25.388 v1@25.017,29.825 ; v1@25.017,29.833 v1@25.017,29.825 ; v1(25.025,29.833) v1@25.017,29.825
AD9: U1.C7 U3.D6 U4.C1 | length 37.3
  Top Layer w0.127: U4.C1@10.225,26.55 v1(10.225,27.1) ; v1(10.475,30.25) v1(24.625,30.25) 25.975,30.25 26.15,30.075 v1(26.15,25.975) ; U3.D6@21.075,25.55 v1(24.625,25.55) ; v1(30.175,24.875) U1.C7@30.5,24.55
  MidLayer1 w0.127: v1(10.225,27.1) 10.225,30 v1(10.475,30.25) ; v1(24.625,25.55) v1(24.625,30.25) ; v1(26.15,25.975) 26.15,25.175 26.267,25.058 29.992,25.058 v1(30.175,24.875)
AD10: U1.D7 U3.D5 U4.C2 | length 39.8
  Top Layer w0.127: v1(9.85,26.175) U4.C2@10.225,25.8 ; v1(10.1,30.642) v1(24.225,30.642) 25.983,30.642 26.542,30.083 26.542,26.585 v1(26.552,26.575) ; U3.D5@20.275,25.55 v1(20.675,25.95) ; v1(30.825,24.875) U1.D7@31.15,24.55
  MidLayer1 w0.127: v1(9.85,26.175) 9.833,26.192 9.833,30.375 v1(10.1,30.642) ; v1(20.675,25.95) 24.05,25.95 24.225,26.125 v1(24.225,30.642) ; v1(26.552,26.575) 26.552,25.998 27.167,25.383 30.317,25.383 v1(30.825,24.875)
AD11: U1.A8 U3.C6 U4.D2 | length 37.9
  Top Layer w0.127: v1(9.1,26.175) U4.D2@9.475,25.8 ; v1@9.35,31.034 v1(23.825,31.034) 26.091,31.034 26.946,30.179 26.946,25.554 27.3,25.2 U1.A8@29.2,25.2 ; U3.C6@21.075,26.35 v1(23.825,26.35)
  MidLayer1 w0.127: v1(9.1,26.175) 9.175,26.25 9.175,30.85 v1(9.35,31.025) ; v1(23.825,26.35) v1(23.825,31.034)
AD12: U1.C8 U3.C5 U4.E2 | length 40.9
  Top Layer w0.127: v1(8.35,26.175) U4.E2@8.725,25.8 ; v1(8.6,31.45) v1(23.425,31.45) 26.15,31.45 27.2,30.4 27.2,25.872 27.539,25.533 30.167,25.533 U1.C8@30.5,25.2 ; U3.C5@20.275,26.35 v1(20.675,26.75)
  MidLayer1 w0.127: v1(8.35,26.175) 8.367,26.192 8.367,31.217 v1(8.6,31.45) ; v1(20.675,26.75) 23.225,26.75 23.425,26.95 v1(23.425,31.45)
AD13: U1.D8 U3.B6 U4.F2 | length 41.7
  Top Layer w0.127: v1(7.6,26.175) U4.F2@7.975,25.8 ; v1(7.6,31.45) 8,31.85 v1(23.025,31.85) 26.275,31.85 27.6,30.525 v1(27.6,26.075) ; U3.B6@21.075,27.15 v1(23.025,27.15) ; v1(30.825,25.525) U1.D8@31.15,25.2
  MidLayer1 w0.127: v1(7.6,26.175) 7.583,26.192 7.583,31.433 v1(7.6,31.45) ; v1(23.025,27.15) v1(23.025,31.85) ; v1(27.6,26.075) 27.6,25.847 27.739,25.708 30.642,25.708 v1(30.825,25.525)
AD14: U1.B9 U3.B5 U4.F1 | length 39.7
  Top Layer w0.127: U4.F1@7.975,26.55 v1(7.975,27.1) ; v1(8.25,32.25) v1(22.625,32.25) 26.4,32.25 27.854,30.796 27.854,26.446 28.117,26.183 29.517,26.183 U1.B9@29.85,25.85 ; U3.B5@20.275,27.15 v1(20.675,27.55)
  MidLayer1 w0.127: v1(7.975,27.1) 7.992,27.117 7.992,32.067 v1@8.175,32.25 ; v1(20.675,27.55) 22.475,27.55 22.625,27.7 v1(22.625,32.25)
AD15: U1.D9 U3.A6 U4.G1 | length 40.9
  Top Layer w0.127: U4.G1@7.225,26.55 v1@7.225,27.05 ; v1@7.425,32.65 v1(22.225,32.65) 26.6,32.65 28.25,31 v1(28.25,26.883) ; U3.A6@21.075,27.95 v1(22.225,27.95) ; v1(30.825,26.175) U1.D9@31.15,25.85
  MidLayer1 w0.127: v1(7.175,27.1) 7.175,32.375 v1(7.425,32.625) ; v1(22.225,27.95) v1(22.225,32.65) ; v1(28.25,26.883) 28.4,26.733 30.267,26.733 v1(30.825,26.175)
AD16: U1.E9 U4.F4 | length 43.3
  Top Layer w0.127: v1(4.375,26.075) 3.729,26.721 3.729,29.61 7.168,33.05 26.75,33.05 28.675,31.125 v1(28.675,27.475) ; v1(7.6,23.925) U4.F4@7.975,24.3 ; v1(31.475,26.175) U1.E9@31.8,25.85
  MidLayer1 w0.127: v1(4.375,26.075) 6.579,23.871 7.546,23.871 v1(7.6,23.925) ; v1(28.675,27.475) 28.675,27.108 28.75,27.033 30.617,27.033 v1(31.475,26.175)
AD17: U1.B10 U4.E4 | length 43.3
  Top Layer w0.127: v1(4.375,25.5) 3.475,26.4 3.475,29.716 7.209,33.45 27.075,33.45 29.525,31 29.525,26.825 U1.B10@29.85,26.5 ; v1(8.35,23.925) U4.E4@8.725,24.3
  MidLayer1 w0.127: v1(4.375,25.5) 6.342,23.533 7.958,23.533 v1(8.35,23.925)
AD18: U1.C10 U4.D3 | length 46.7
  Top Layer w0.127: v1(4.375,24.926) 3.221,26.08 3.221,29.821 7.242,33.842 27.308,33.842 30.175,30.975 30.175,26.825 U1.C10@30.5,26.5 ; v1(9.1,24.675) U4.D3@9.475,25.05
  MidLayer1 w0.127: v1(4.375,24.926) 6.022,23.279 8.379,23.279 9.1,24 v1(9.1,24.675)